# EAGLE board 2 (EAGLE 5.11)
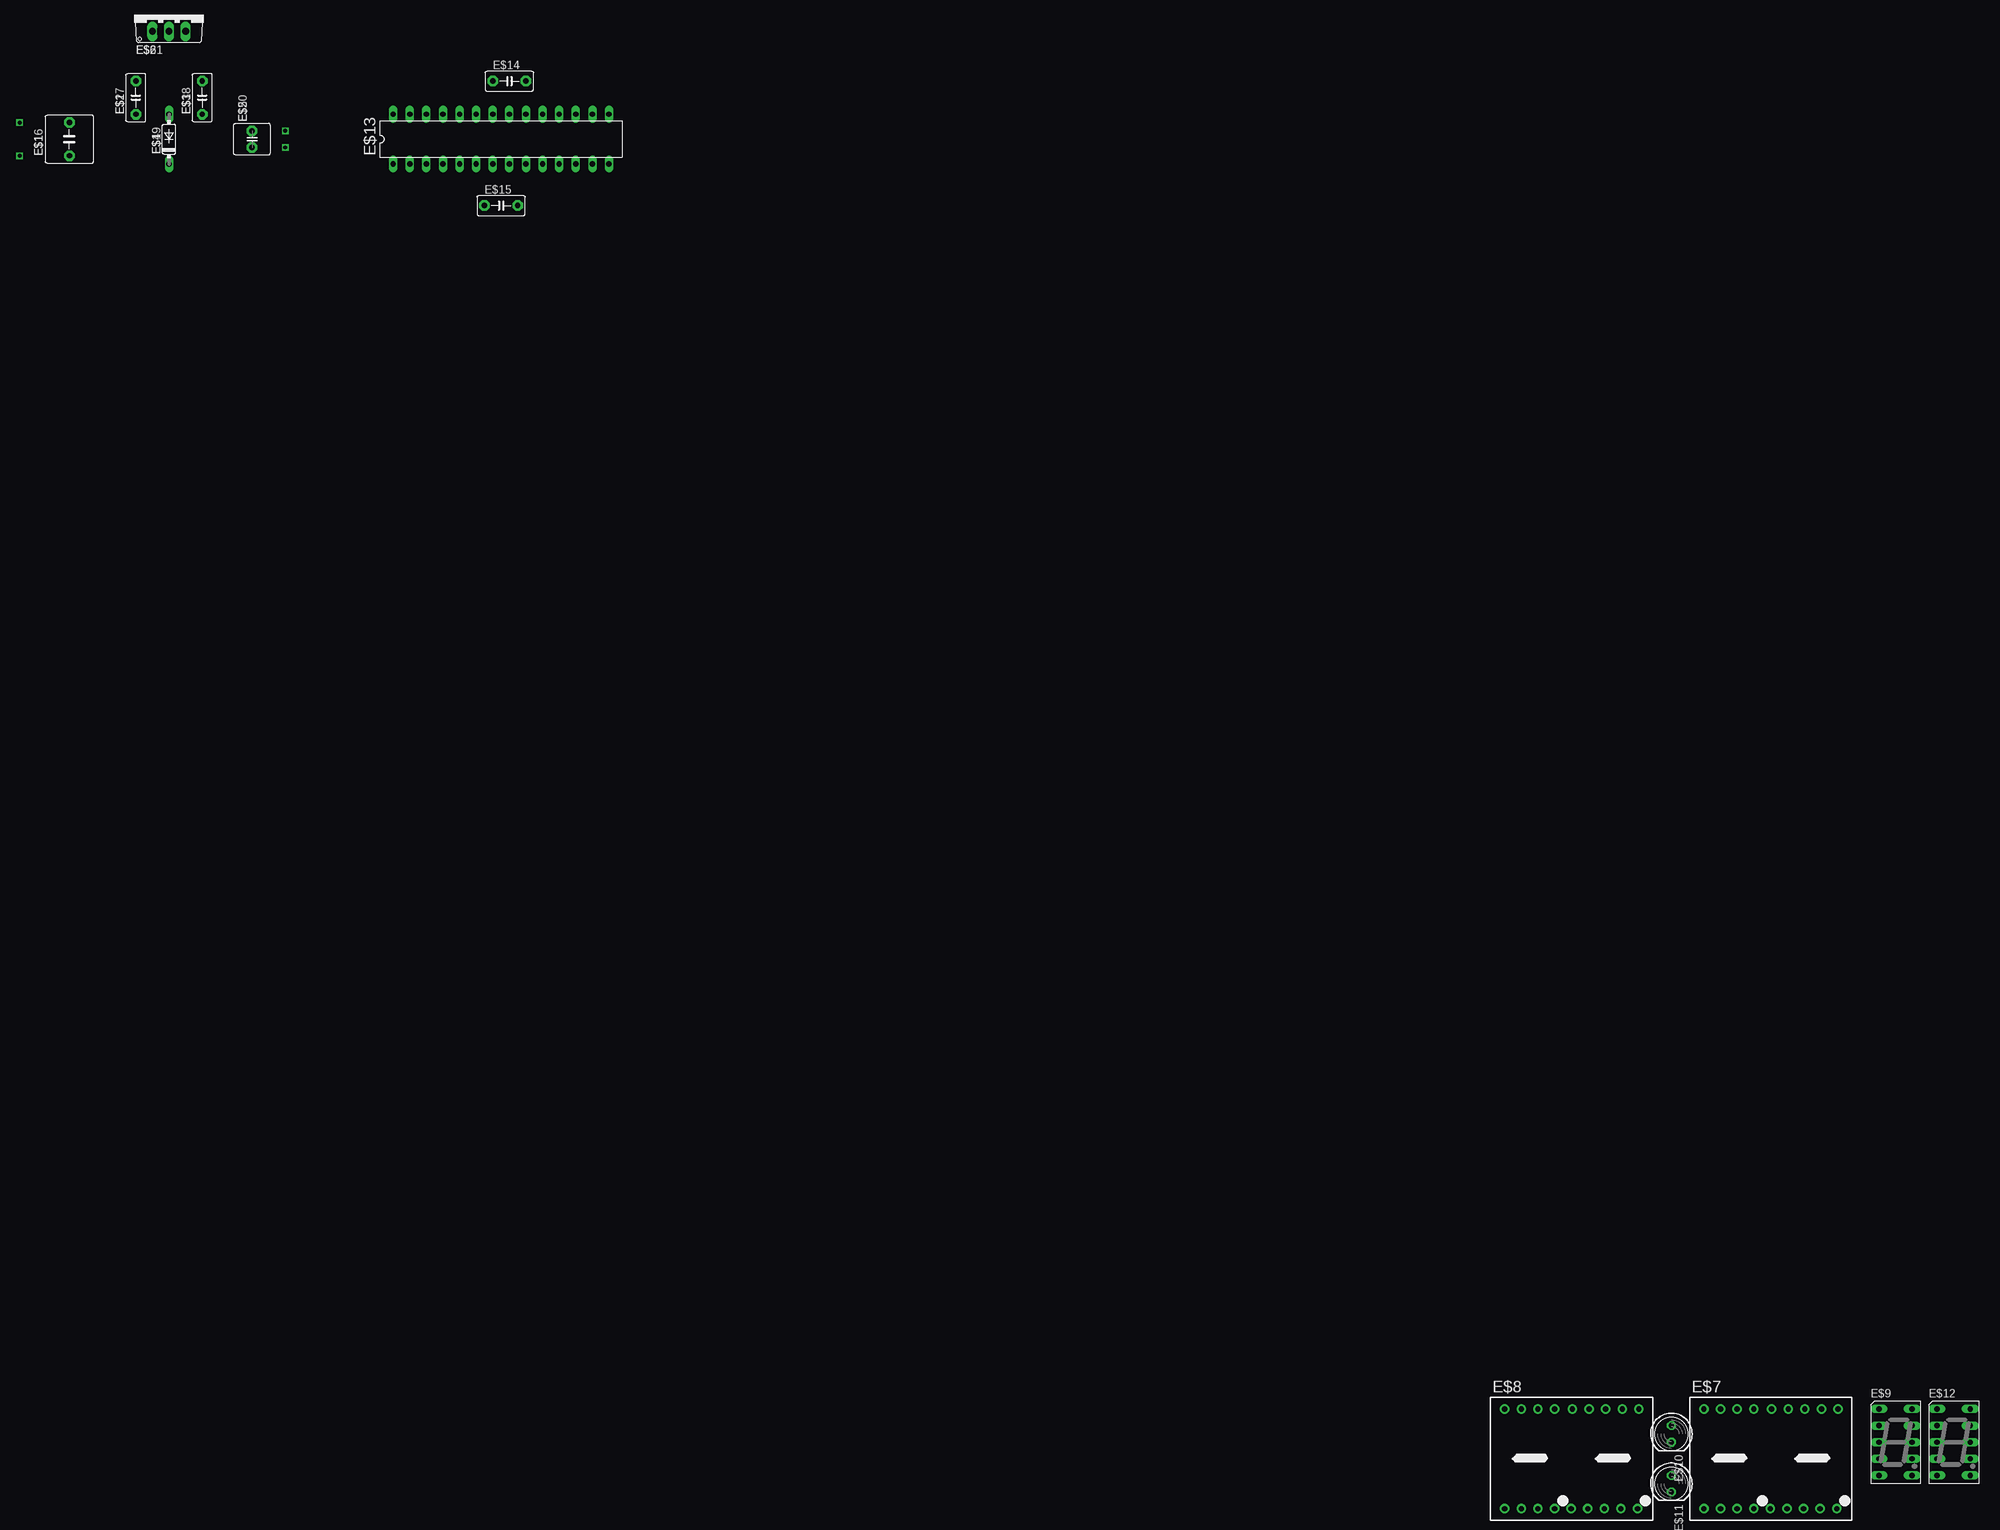
[diagram p0: board, top side]
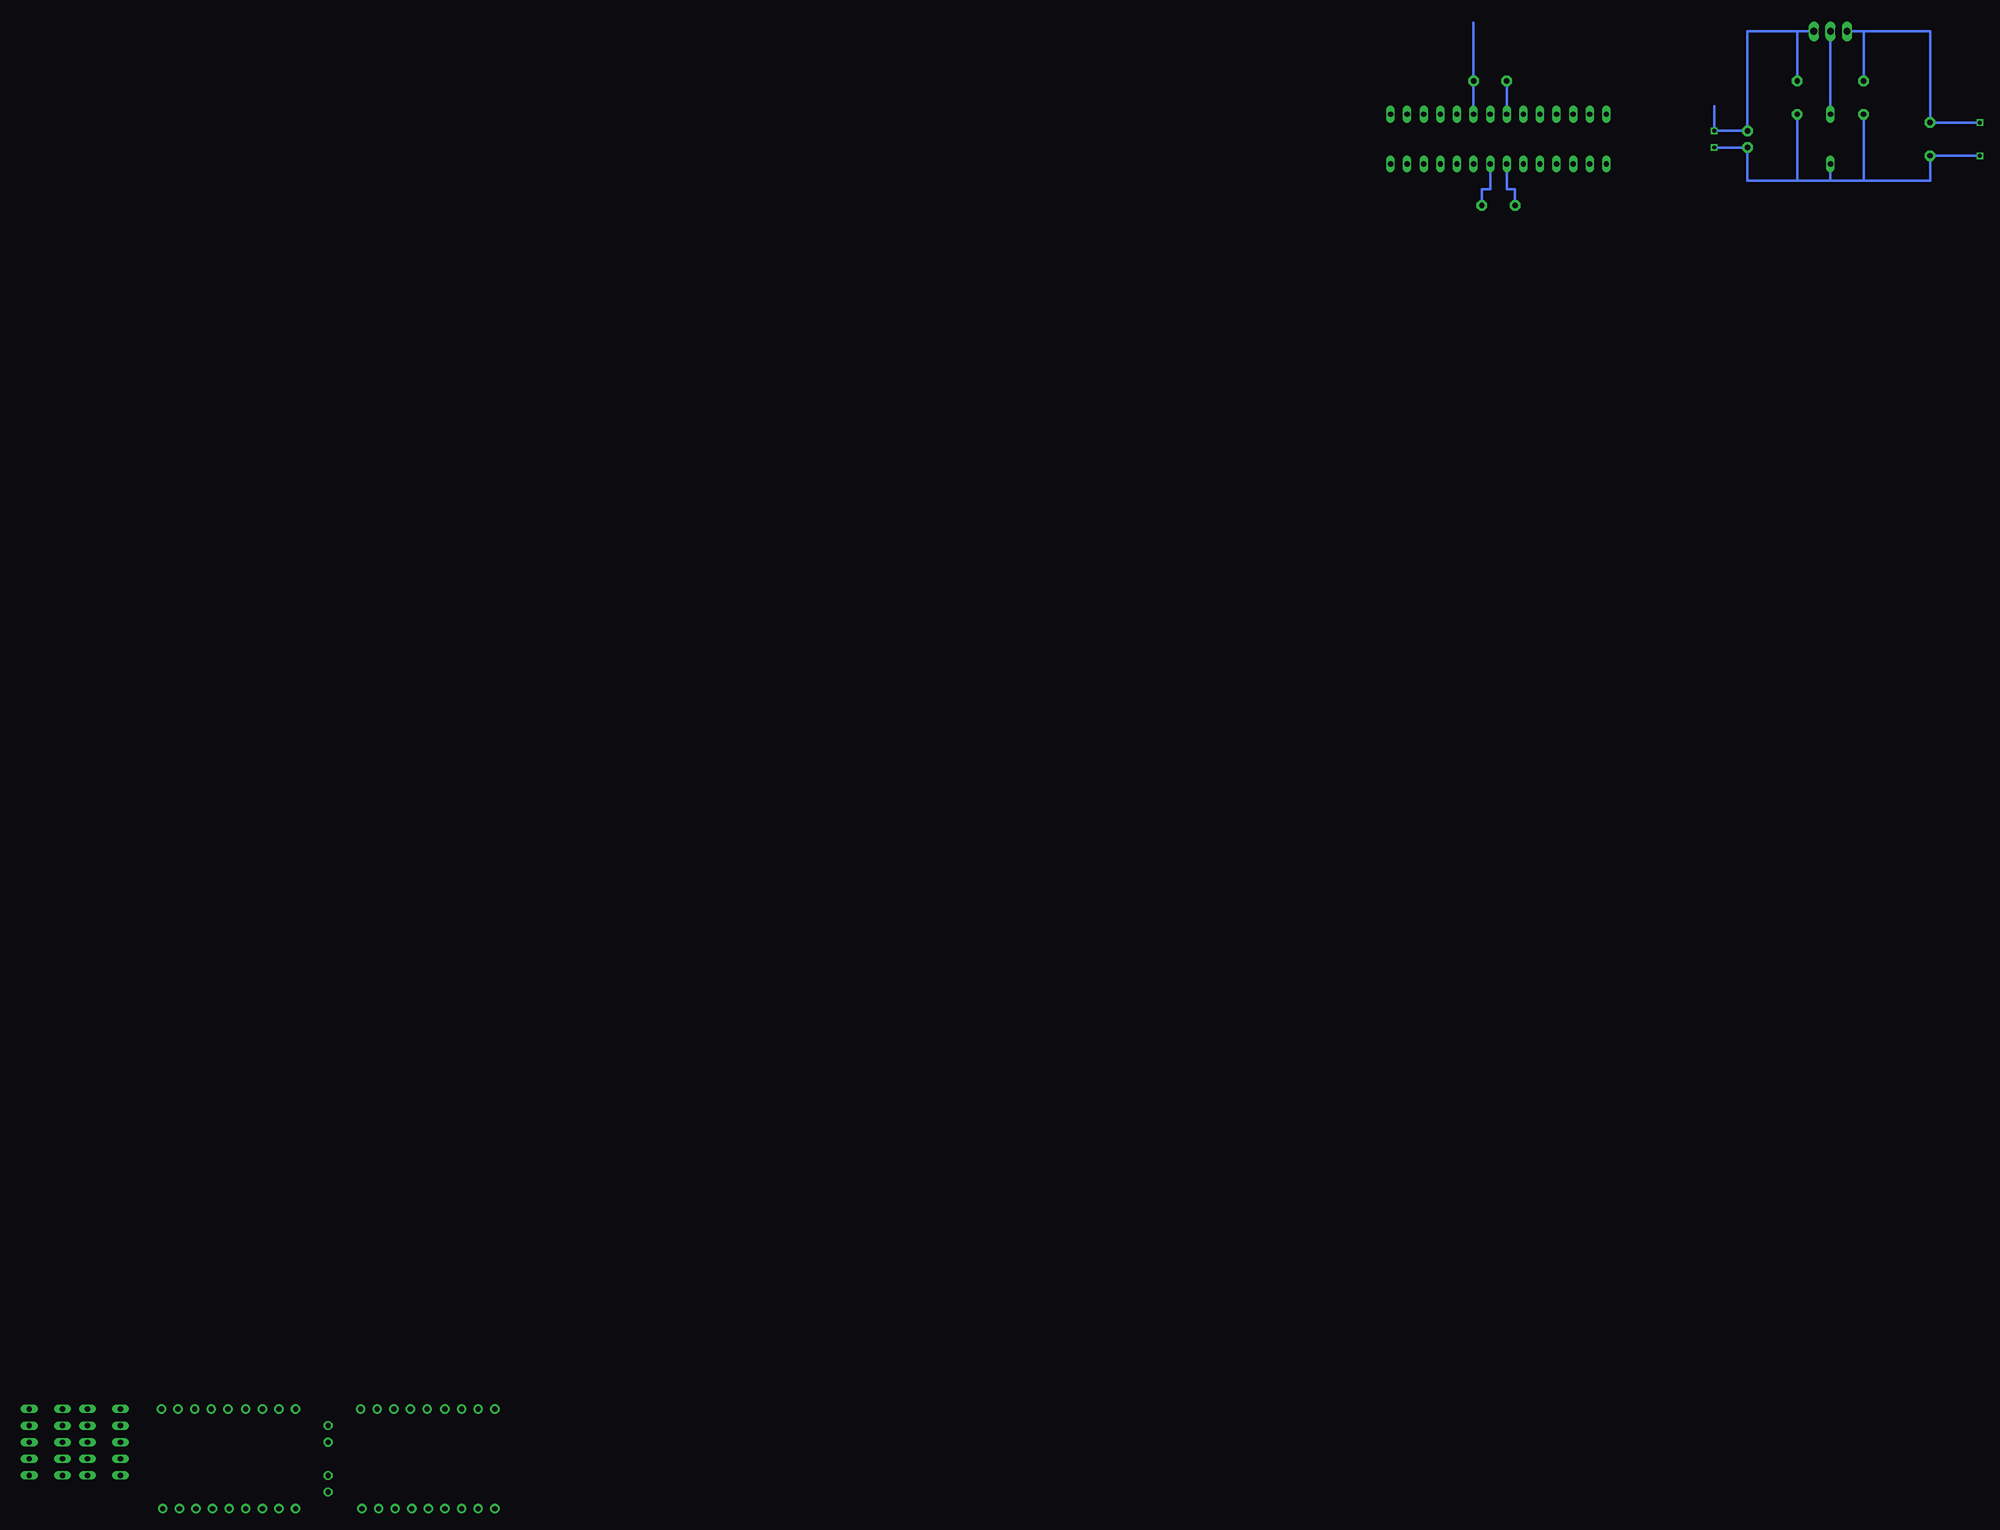
[diagram p1: board, bottom side, seen from below]

No outline drawn. Coordinates in mm, seen from the top.
Copper layers (1*16): Top 0.035mm / dielectric 1.5mm / Bottom 0.035mm
Design rules "default": minimum track width 10mil, minimum drill 24mil, track to track 8mil, track to pad 8mil, pad to pad 8mil, via to via 8mil, smd to smd 8mil, copper to edge 40mil, drill to drill 8mil, minimum pad ring 10mil, minimum via ring 8mil, stop-mask expansion 4mil, vias tented up to drill 0mil, thermal gap 10mil

## Footprints (pad centres in the part's own frame; a part is rotated, then mirrored left to right if it is on the bottom)
C5B7.2 = drill 0.813 pad 1.6 octagon: 1 -2.54,0; 2 2.54,0
C5B3 = drill 0.813 pad 1.6 octagon: 1 -2.54,0; 2 2.54,0
DO35-7 = drill 0.813 long: A 3.81,0; C -3.81,0
C2.5-6 = drill 0.813 pad 1.6 octagon: 1 -1.27,0; 2 1.27,0
TO220AV = drill 1.016 long: B -2.54,-2.54; C 0,-2.54; E 2.54,-2.54
DA56 = drill 0.8 pad 1.422 round: 1 -10.26,-7.62; 2 -7.72,-7.62; 3 -5.18,-7.62; 4 -2.64,-7.62; 5 -0.1,-7.62; 6 2.44,-7.62; 7 4.98,-7.62; 8 7.52,-7.62; 9 10.06,-7.62; 10 10.26,7.62; 11 7.72,7.62; 12 5.18,7.62; 13 2.64,7.62; 14 0.1,7.62; 15 -2.64,7.62; 16 -5.18,7.62; 17 -7.72,7.62; 18 -10.26,7.62
HDSP-A = drill 0.813 long: 1 -2.54,5.08; 2 -2.54,2.54; 3 -2.54,0; 4 -2.54,-2.54; 5 -2.54,-5.08; 6 2.54,-5.08; 7 2.54,-2.54; 8 2.54,0; 9 2.54,2.54; 10 2.54,5.08
LED5MM = drill 0.813 octagon: A -1.27,0; K 1.27,0
DIL28-3 = drill 0.813 long: 1 -16.51,-3.81; 2 -13.97,-3.81; 3 -11.43,-3.81; 4 -8.89,-3.81; 5 -6.35,-3.81; 6 -3.81,-3.81; 7 -1.27,-3.81; 8 1.27,-3.81; 9 3.81,-3.81; 10 6.35,-3.81; 11 8.89,-3.81; 12 11.43,-3.81; 13 13.97,-3.81; 14 16.51,-3.81; 15 16.51,3.81; 16 13.97,3.81; 17 11.43,3.81; 18 8.89,3.81; 19 6.35,3.81; 20 3.81,3.81; 21 1.27,3.81; 22 -1.27,3.81; 23 -3.81,3.81; 24 -6.35,3.81; 25 -8.89,3.81; 26 -11.43,3.81; 27 -13.97,3.81; 28 -16.51,3.81

## Placement (x,y rotation side)
E$1  [C5B7.2]  -46.99,173.99 90 top
E$2  [C5B3]  -36.83,180.34 90 top
E$3  [C5B3]  -26.67,180.34 90 top
E$4  [DO35-7]  -31.75,173.99 90 top
E$5  [C2.5-6]  -19.05,173.99 90 top
E$6  [TO220AV]  -31.75,193.04 0 top
E$7  [DA56]  213.36,-27.94 0 top
E$8  [DA56]  182.88,-27.94 0 top
E$9  [HDSP-A]  232.41,-25.4 0 top
E$10  [LED5MM]  198.12,-24.13 270 top
E$11  [LED5MM]  198.12,-31.75 270 top
E$12  [HDSP-A]  241.3,-25.4 0 top
E$13  [DIL28-3]  19.05,173.99 0 top
E$14  [C5B3]  20.32,182.88 0 top
E$15  [C5B3]  19.05,163.83 0 top
E$16  [C5B7.2]  -46.99,173.99 90 top
E$17  [C5B3]  -36.83,180.34 90 top
E$18  [C5B3]  -26.67,180.34 90 top
E$19  [DO35-7]  -31.75,173.99 90 top
E$20  [C2.5-6]  -19.05,173.99 90 top
E$21  [TO220AV]  -31.75,193.04 0 top

## Library data of the parts
E$1-E$3 E$5 E$14-E$18 E$20 = capacitor-wima
E$4 E$19 = diode
E$6 E$21 = transistor-power
E$7 E$8 = display-kingbright
E$9 E$12 = display-hp
E$10 E$11 = led
E$13 = atmel

## Nets
S$1: E$1.1 E$2.1 E$3.1 E$4.C E$5.1
S$2: E$2.2 E$6.B
S$3: E$13.20 E$14.2
S$4: E$4.A E$6.C
S$6: E$13.7 E$15.1
S$7: E$13.8 E$15.2
S$8: E$3.2 E$5.2 E$6.E
S$9: E$17.2 E$21.B
S$10: E$13.22 E$14.1
S$11: E$19.A E$21.C
S$13: E$16.1 E$17.1 E$18.1 E$19.C E$20.1
S$14: E$18.2 E$20.2 E$21.E

## Tracks (layer width: path | path; a pad name or v marks a point on that pad's centre or on a via)
S$1  (via drill 0.6)
  Bottom 0.406: v-13.97,172.72 E$5.1 -19.05,167.64 -26.67,167.64 | -26.67,167.64 E$3.1 | -31.75,167.64 E$4.C | -31.75,167.64 -26.67,167.64 | -36.83,167.64 -31.75,167.64 | -36.83,167.64 E$2.1 | -36.83,167.64 -46.99,167.64 E$1.1 -54.61,171.45
S$2  (via drill 0.6)
  Bottom 0.406: v-54.61,176.53 -46.99,176.53 -46.99,190.5 -36.83,190.5 | -36.83,190.5 E$6.B | E$2.2 -36.83,190.5
S$3
  Bottom 0.406: E$13.20 E$14.2 22.86,191.77
S$4
  Bottom 0.406: E$6.C E$4.A
S$5  (via drill 0.6)
  other vias: -54.61,171.45
S$6
  Bottom 0.406: E$13.7 17.78,166.37 16.51,166.37 E$15.1
S$7
  Bottom 0.406: E$13.8 20.32,166.37 21.59,166.37 E$15.2
S$8  (via drill 0.6)
  Bottom 0.406: -26.67,190.5 E$6.E | -26.67,190.5 -19.05,190.5 E$5.2 v-13.97,175.26 -13.97,179.07 | E$3.2 -26.67,190.5
S$9  (via drill 0.6)
  Bottom 0.406: v-54.61,176.53 -46.99,176.53 -46.99,190.5 -36.83,190.5 | -36.83,190.5 E$21.B | E$17.2 -36.83,190.5
S$10
  Bottom 0.406: E$13.22 E$14.1
S$11
  Bottom 0.406: E$21.C E$19.A
S$12  (via drill 0.6)
  other vias: -54.61,171.45
S$13  (via drill 0.6)
  Bottom 0.406: v-13.97,172.72 E$20.1 -19.05,167.64 -26.67,167.64 | -26.67,167.64 E$18.1 | -31.75,167.64 E$19.C | -31.75,167.64 -26.67,167.64 | -36.83,167.64 -31.75,167.64 | -36.83,167.64 E$17.1 | -36.83,167.64 -46.99,167.64 E$16.1 -54.61,171.45
S$14  (via drill 0.6)
  Bottom 0.406: -26.67,190.5 E$21.E | -26.67,190.5 -19.05,190.5 E$20.2 v-13.97,175.26 -13.97,179.07 | E$18.2 -26.67,190.5